# EAGLE board controller (EAGLE 8.1.1), part 1 of 2
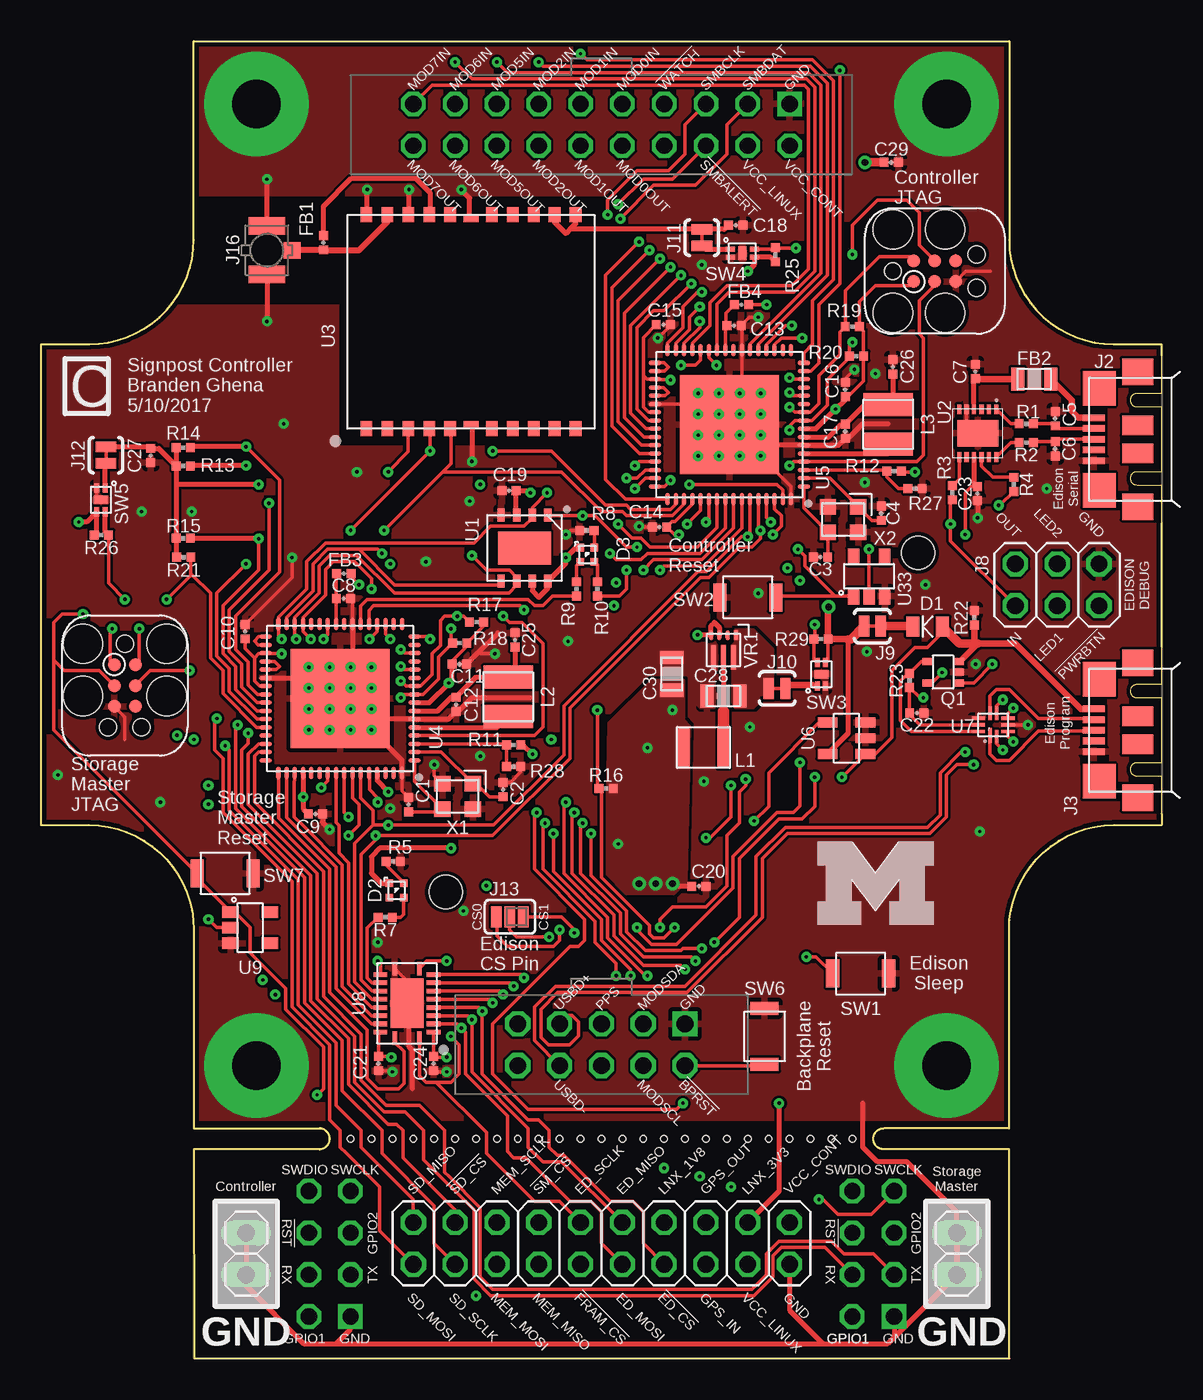
[diagram p0: board, top side]
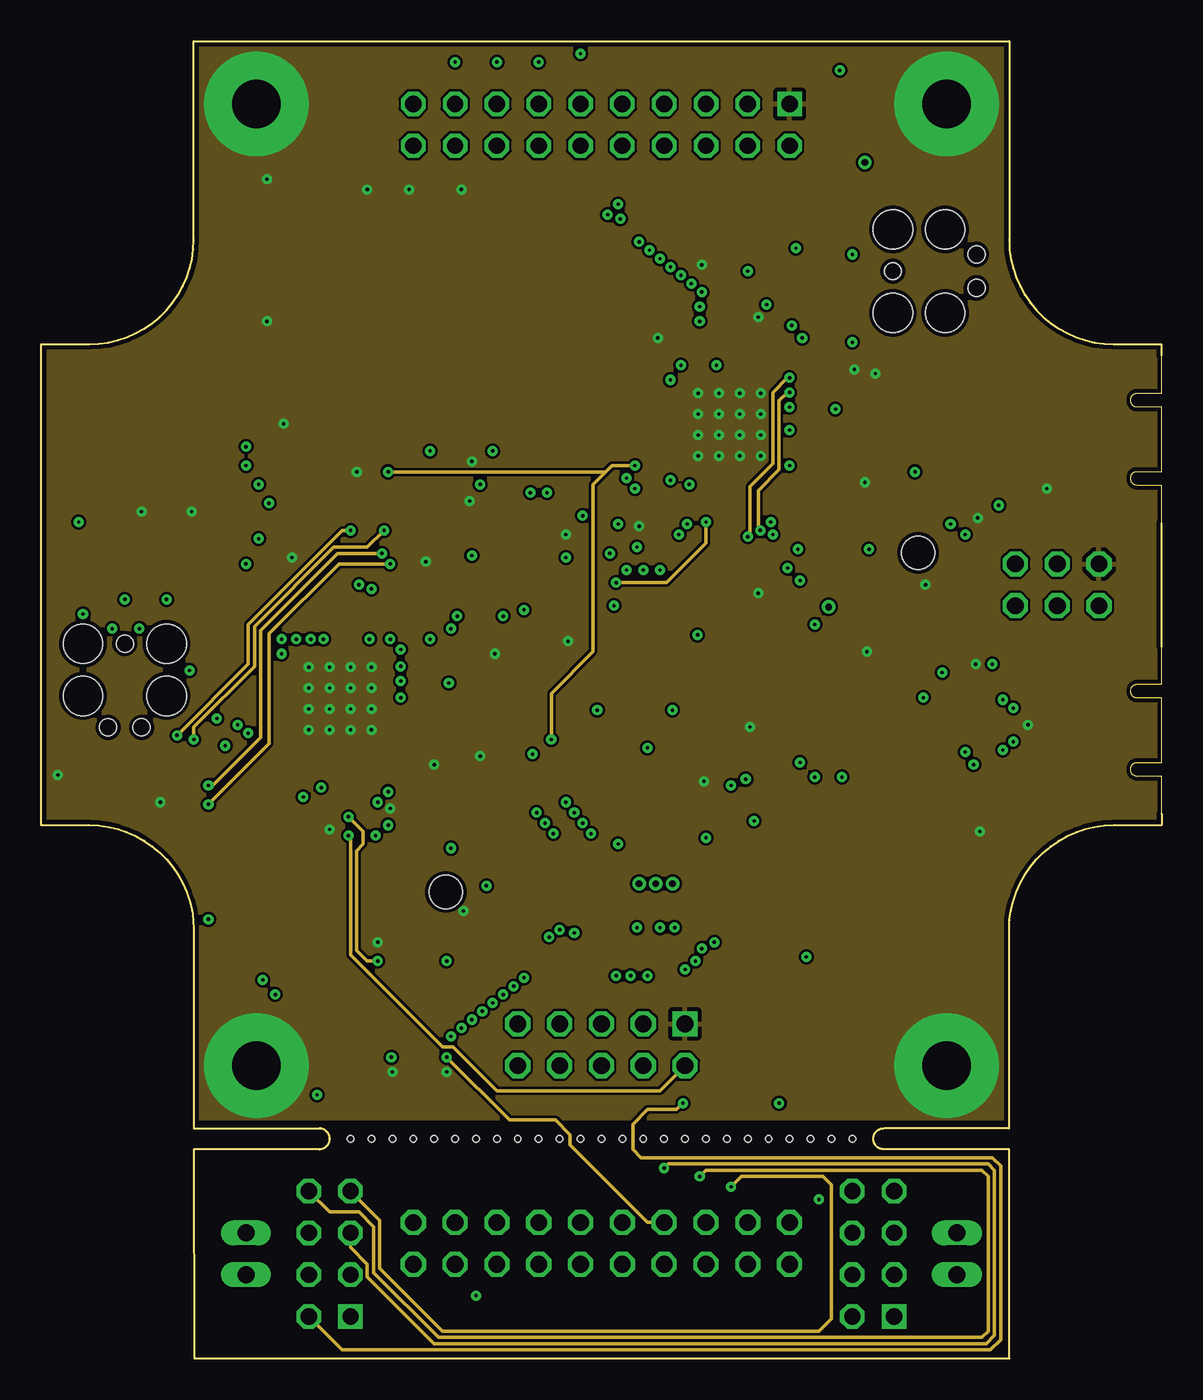
[diagram p1: board, inner layer Route2]
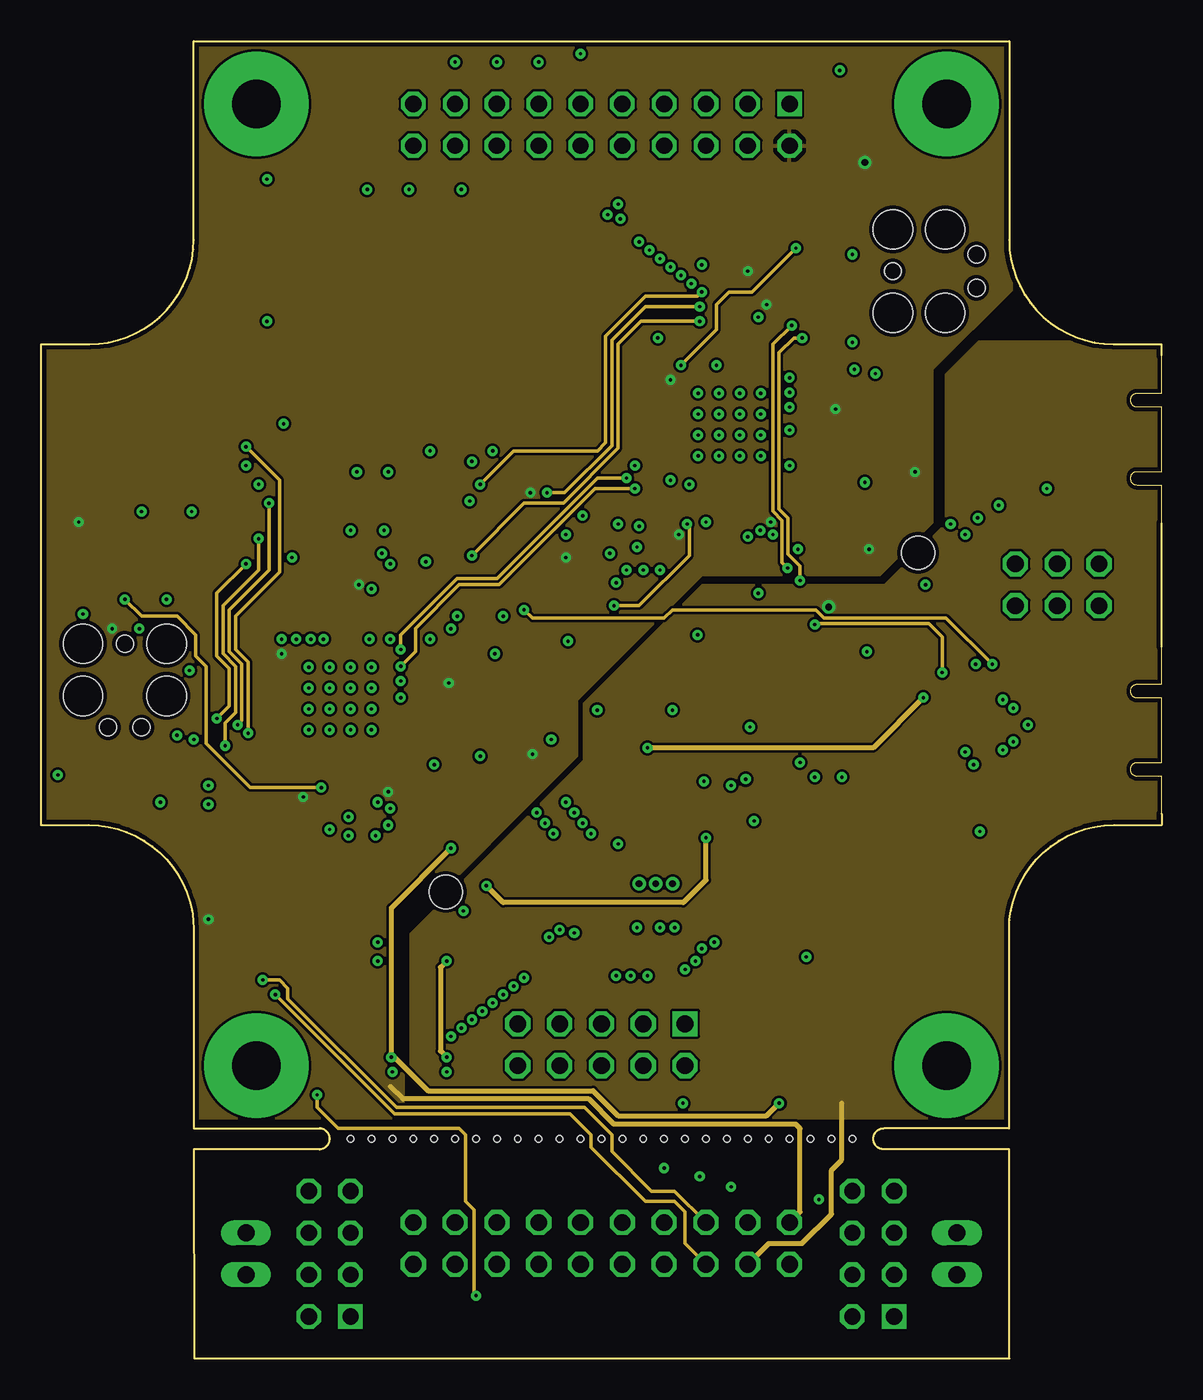
[diagram p2: board, inner layer Route15]
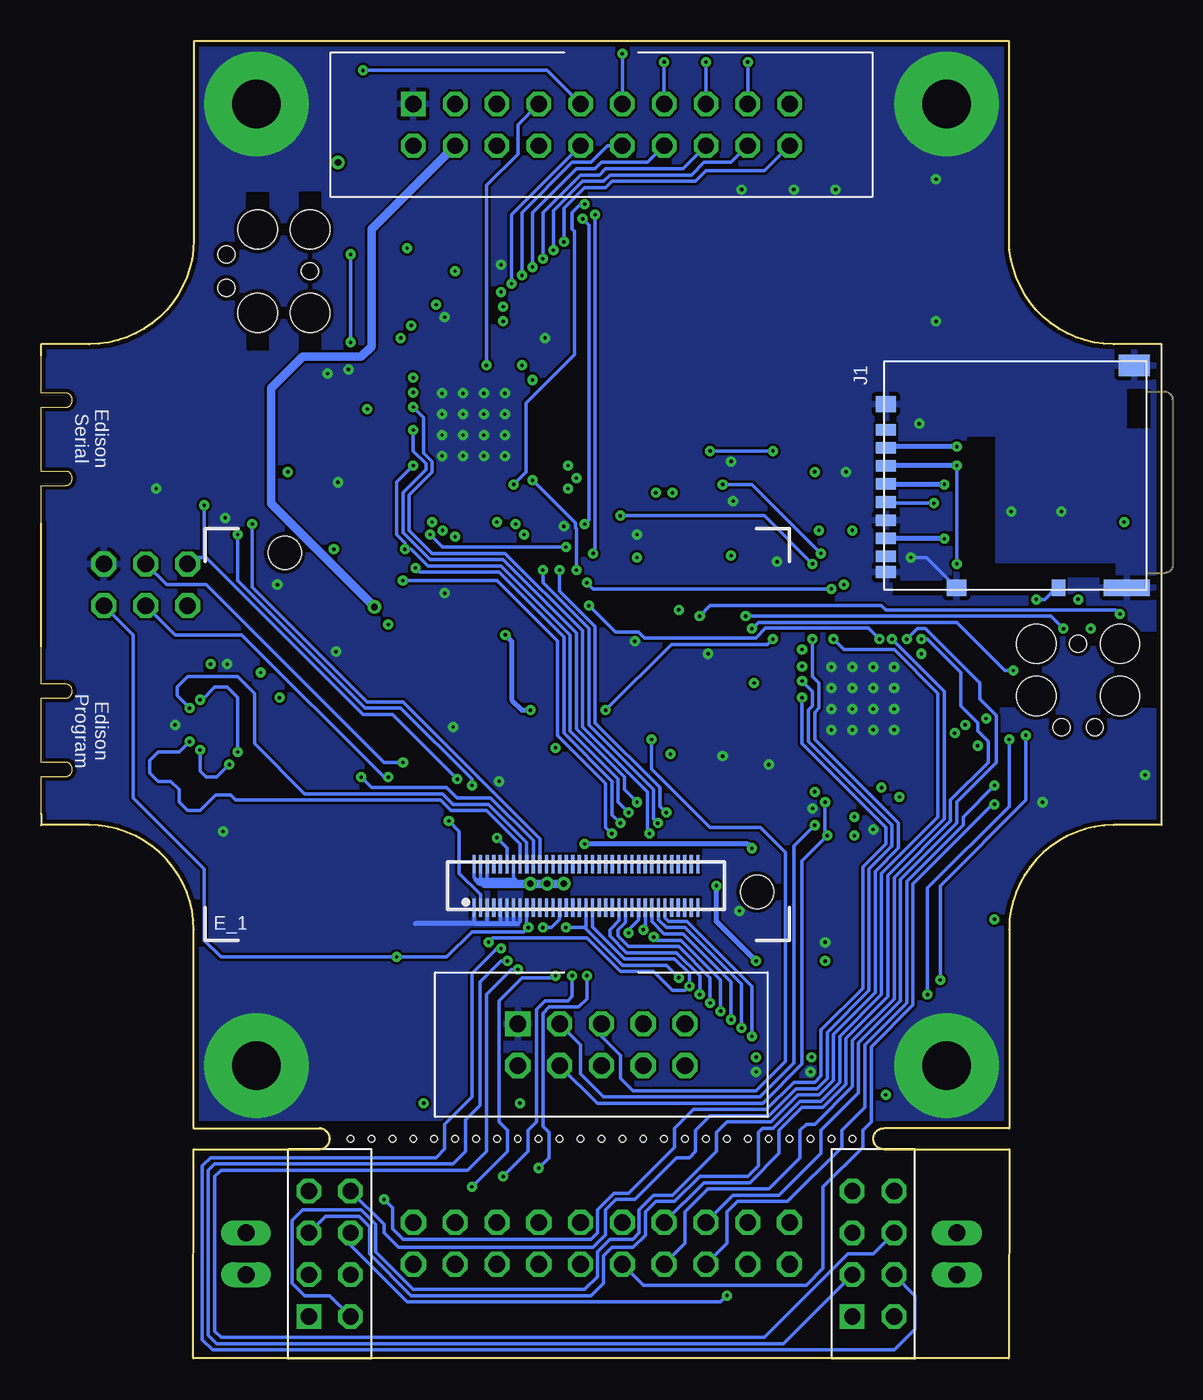
[diagram p3: board, bottom side, seen from below]

Size 68.07 x 80.01 mm. Coordinates in mm from the lower left corner, seen from the top.
Outline: 68.07,33.07 68.07,32.39 65.15,32.39 arc90 58.8,26.04 58.8,13.97 51.18,13.97 arc180 51.18,12.7 58.8,12.7 58.83,0 9.3,0 9.27,12.7 16.89,12.7 arc180 16.89,13.97 9.27,13.97 9.27,26.04 arc90 2.92,32.39 0,32.39 0,61.59 2.92,61.59 arc90 9.27,67.94 9.27,80.01 58.8,80.01 58.8,67.94 arc90 65.15,61.59 68.07,61.59 68.07,60.91
Outline: 68.07,43.23 68.07,50.72
Copper layers (1+2*15+16): Top 0.0178mm / dielectric 12mil / Route2 0.0356mm / dielectric 28mil / Route15 0.0356mm / dielectric 12mil / Bottom 0.0178mm
Design rules "sunstone-4lyr_v1.0.0.3 *": minimum track width 6mil, minimum drill 8mil, track to track 6mil, track to pad 6mil, pad to pad 6mil, via to via 6mil, smd to smd 6mil, copper to edge 10mil, drill to drill 16mil, minimum pad ring 8mil, minimum via ring 8mil, stop-mask expansion 3mil, vias tented up to drill 50mil, thermal gap 10mil

## Footprints (pad centres in the part's own frame; a part is rotated, then mirrored left to right if it is on the bottom)
0402_CAP = smd 0.536 x 0.546: 1 -0.433,0; 2 0.433,0
0805_CAP = smd 0.8 x 1.4: P$1 1,0; P$2 -1,0
0805_DIODE = smd 0.8 x 1.2: ANODE -0.9,0; CATHODE 0.9,0
1MM_SQ_4PAD = smd 0.457 x 0.457: 1 0.432,0.432; 2 0.432,-0.432; 3 -0.432,-0.432; 4 -0.432,0.432
EDISON_DAUGHTER = smd 1.14 x 0.2: 1 1.98,19.17; 2 4.62,19.17; 3 1.98,18.77; 4 4.62,18.77; 5 1.98,18.37; 6 4.62,18.37; 7 1.98,17.97; 8 4.62,17.97; 9 1.98,17.57; 10 4.62,17.57; 11 1.98,17.17; 12 4.62,17.17; 13 1.98,16.77; 14 4.62,16.77; 15 1.98,16.37; 16 4.62,16.37; 17 1.98,15.97; 18 4.62,15.97; 19 1.98,15.57; 20 4.62,15.57; 21 1.98,15.17; 22 4.62,15.17; 23 1.98,14.77; 24 4.62,14.77; 25 1.98,14.37; 26 4.62,14.37; 27 1.98,13.97; 28 4.62,13.97; 29 1.98,13.57; 30 4.62,13.57; 31 1.98,13.17; 32 4.62,13.17; 33 1.98,12.77; 34 4.62,12.77; 35 1.98,12.37; 36 4.62,12.37; 37 1.98,11.97; 38 4.62,11.97; 39 1.98,11.57; 40 4.62,11.57; 41 1.98,11.17; 42 4.62,11.17; 43 1.98,10.77; 44 4.62,10.77; 45 1.98,10.37; 46 4.62,10.37; 47 1.98,9.97; 48 4.62,9.97; 49 1.98,9.57; 50 4.62,9.57; 51 1.98,9.17; 52 4.62,9.17; 53 1.98,8.77; 54 4.62,8.77; 55 1.98,8.37; 56 4.62,8.37; 57 1.98,7.97; 58 4.62,7.97; 59 1.98,7.57; 60 4.62,7.57; 61 1.98,7.17; 62 4.62,7.17; 63 1.98,6.77; 64 4.62,6.77; 65 1.98,6.37; 66 4.62,6.37; 67 1.98,5.97; 68 4.62,5.97; 69 1.98,5.57; 70 4.62,5.57 | hole 2: 23.53,30.67; 2.93,1.98
DM3AT-SF-PEJM5 = smd 0.7 x 1.2: 1 3.2,-0.1; 2 2.1,-0.1; 3 1,-0.1; 4 -0.1,-0.1; 5 -1.2,-0.1; 6 -2.3,-0.1; 7 -3.4,-0.1; 8 -4.5,-0.1; B -5.45,-0.1 | smd 1 x 0.8: A -6.4,-10.6 | smd 1 x 1.2: MOUNT0 4.75,-0.1; MOUNT1 -6.4,-4.4 | smd 1 x 2.8: MOUNT2 -6.4,-14.75 | smd 1.3 x 1.9: MOUNT3 7.1,-15.2
USB_MICRO_B-HIROSE-ZX62R-B-5P = smd 0.4 x 1.35: 1 1.3,4.125; 2 0.65,4.125; 3 0,4.125; 4 -0.65,4.125; 5 -1.3,4.125 | smd 2.1 x 2: P$1 3.1,3.8; P$2 -3.1,3.8 | smd 1.6 x 1.9: P$3 -4.1,1.45; P$6 4.1,1.45 | smd 1.2 x 1.9: P$4 -0.85,1.45; P$5 0.85,1.45
MODULE_CONTROLLER = drill 0.991 square: 1 11.43,29.21; 100 -15.24,-44.45; 200 17.78,-44.45 | drill 0.991 octagon: 2 11.43,26.67; 3 8.89,29.21; 4 8.89,26.67; 5 6.35,29.21; 6 6.35,26.67; 7 3.81,29.21; 8 3.81,26.67; 9 1.27,29.21; 10 1.27,26.67; 11 -1.27,29.21; 12 -1.27,26.67; 13 -3.81,29.21; 14 -3.81,26.67; 15 -6.35,29.21; 16 -6.35,26.67; 17 -8.89,29.21; 18 -8.89,26.67; 19 -11.43,29.21; 20 -11.43,26.67; 101 -17.78,-44.45; 102 -15.24,-41.91; 103 -17.78,-41.91; 104 -15.24,-39.37; 105 -17.78,-39.37; 106 -15.24,-36.83; 107 -17.78,-36.83; 201 15.24,-44.45; 202 17.78,-41.91; 203 15.24,-41.91; 204 17.78,-39.37; 205 15.24,-39.37; 206 17.78,-36.83; 207 15.24,-36.83 | drill 1.016 square: 21 5.08,-26.67 | drill 1.016 octagon: 22 5.08,-29.21; 23 2.54,-26.67; 24 2.54,-29.21; 25 0,-26.67; 26 0,-29.21; 27 -2.54,-26.67; 28 -2.54,-29.21; 29 -5.08,-26.67; 30 -5.08,-29.21 | hole 0.381: 0,-33.655; 1.27,-33.655; -1.27,-33.655; 3.81,-33.655; 5.08,-33.655; 2.54,-33.655; -3.81,-33.655; -2.54,-33.655; -5.08,-33.655; 11.43,-33.655; 12.7,-33.655; 10.16,-33.655; 15.24,-33.655; 13.97,-33.655; 7.62,-33.655; 8.89,-33.655; 6.35,-33.655; -11.43,-33.655; -10.16,-33.655; -12.7,-33.655; -7.62,-33.655; -6.35,-33.655; -8.89,-33.655; -15.24,-33.655; -13.97,-33.655
1X02 = drill 1.016 long: 1 -1.27,0; 2 1.27,0
2X10 = drill 1.016 octagon: 1 -11.43,-1.27; 2 -11.43,1.27; 3 -8.89,-1.27; 4 -8.89,1.27; 5 -6.35,-1.27; 6 -6.35,1.27; 7 -3.81,-1.27; 8 -3.81,1.27; 9 -1.27,-1.27; 10 -1.27,1.27; 11 1.27,-1.27; 12 1.27,1.27; 13 3.81,-1.27; 14 3.81,1.27; 15 6.35,-1.27; 16 6.35,1.27; 17 8.89,-1.27; 18 8.89,1.27; 19 11.43,-1.27; 20 11.43,1.27
2X03 = drill 1.016 octagon: 1 -2.54,-1.27; 2 -2.54,1.27; 3 0,-1.27; 4 0,1.27; 5 2.54,-1.27; 6 2.54,1.27
SJ_2S-TRACE = smd 0.635 x 1.27: 1 -0.508,0; 2 0.508,0
SJ_3_PASTE2&3 = smd 0.635 x 1.27: 1 -0.813,0; 2 0,0; 3 0.813,0
TC2030-IDC = smd 0.787 x 0.787: 1 -1.27,-0.635; 2 -1.27,0.635; 3 0,-0.635; 4 0,0.635; 5 1.27,-0.635; 6 1.27,0.635 | hole 2.375: -2.54,2.54; 0.635,2.54; 0.635,-2.54; -2.54,-2.54 | hole 1.016: -2.54,0; 2.54,1.016; 2.54,-1.016
U.FL_SMT = smd 1.05 x 2.2: GND1 -1.475,0; GND2 1.475,0 | smd 1 x 1.05: SIG 0,-1.525
DFE322512C = smd 0.75 x 2.5: P$1 1.225,0; P$2 -1.225,0
1212 = smd 1.4 x 3: P$1 -1.2,0; P$2 1.2,0
SOT353 = smd 0.42 x 0.6: D1 0.65,-0.95; D2 -0.65,-0.95; G1 0.65,0.95; G2 -0.65,0.95; S 0,0.95
0402_RES = smd 0.536 x 0.546: 1 -0.433,0; 2 0.433,0
B3U-1000P = smd 0.8 x 1.7: 1 -1.7,0; 2 1.7,0
TDFN4 = smd 0.3 x 0.55: 1 -0.25,-0.725; 2 0.25,-0.725; 3 0.25,0.725; 4 -0.25,0.725 | smd 0.86 x 0.5: PAD 0,0
TDFN-8 = smd 0.45 x 0.8: 1 -1.425,-2.007; 2 -0.475,-2.007; 3 0.475,-2.007; 4 1.425,-2.007; 5 1.425,2.007; 6 0.475,2.007; 7 -0.475,2.007; 8 -1.425,2.007 | smd 3.2 x 2: NC 0,0
DFN-12/3MM = smd 0.6 x 0.25: 1 -1.45,1.13; 2 -1.45,0.68; 3 -1.45,0.23; 4 -1.45,-0.23; 5 -1.45,-0.68; 6 -1.45,-1.13; 7 1.45,-1.13; 8 1.45,-0.68; 9 1.45,-0.23; 10 1.45,0.23; 11 1.45,0.68; 12 1.45,1.13 | smd 1.6 x 2.5: 13 0,0
RXM-GPS-RM-T = smd 0.711 x 0.914: 1 -6.35,-6.502; 2 -5.08,-6.502; 3 -3.81,-6.502; 4 -2.54,-6.502; 5 -1.27,-6.502; 6 1.27,-6.502; 7 2.54,-6.502; 8 3.81,-6.502; 9 5.08,-6.502; 10 6.35,-6.502; 11 6.35,6.502; 12 5.08,6.502; 13 3.81,6.502; 14 2.54,6.502; 15 1.27,6.502; 16 -1.27,6.502; 17 -2.54,6.502; 18 -3.81,6.502; 19 -5.08,6.502; 20 -6.35,6.502 | smd 0.914 x 0.457: 21 0,-6.274; 22 0,6.274
QFN-64-9MM = smd 0.75 x 0.28: 1 -4.525,3.75; 2 -4.525,3.25; 3 -4.525,2.75; 4 -4.525,2.25; 5 -4.525,1.75; 6 -4.525,1.25; 7 -4.525,0.75; 8 -4.525,0.25; 9 -4.525,-0.25; 10 -4.525,-0.75; 11 -4.525,-1.25; 12 -4.525,-1.75; 13 -4.525,-2.25; 14 -4.525,-2.75; 15 -4.525,-3.25; 16 -4.525,-3.75; 33 4.525,-3.75; 34 4.525,-3.25; 35 4.525,-2.75; 36 4.525,-2.25; 37 4.525,-1.75; 38 4.525,-1.25; 39 4.525,-0.75; 40 4.525,-0.25; 41 4.525,0.25; 42 4.525,0.75; 43 4.525,1.25; 44 4.525,1.75; 45 4.525,2.25; 46 4.525,2.75; 47 4.525,3.25; 48 4.525,3.75 | smd 0.28 x 0.75: 17 -3.75,-4.525; 18 -3.25,-4.525; 19 -2.75,-4.525; 20 -2.25,-4.525; 21 -1.75,-4.525; 22 -1.25,-4.525; 23 -0.75,-4.525; 24 -0.25,-4.525; 25 0.25,-4.525; 26 0.75,-4.525; 27 1.25,-4.525; 28 1.75,-4.525; 29 2.25,-4.525; 30 2.75,-4.525; 31 3.25,-4.525; 32 3.75,-4.525; 49 3.75,4.525; 50 3.25,4.525; 51 2.75,4.525; 52 2.25,4.525; 53 1.75,4.525; 54 1.25,4.525; 55 0.75,4.525; 56 0.25,4.525; 57 -0.25,4.525; 58 -0.75,4.525; 59 -1.25,4.525; 60 -1.75,4.525; 61 -2.25,4.525; 62 -2.75,4.525; 63 -3.25,4.525; 64 -3.75,4.525 | smd 6 x 6: GND 0,0
SOT-23-5 = smd 0.6 x 1.2: 1 -0.95,-1.15; 2 0,-1.15; 3 0.95,-1.15; 4 0.95,1.15; 5 -0.95,1.15
UQFN-10 = smd 0.2 x 0.9: 1 -0.2,-0.65 | smd 0.2 x 0.8: 2 0.2,-0.7; 6 0.2,0.7; 7 -0.2,0.7 | smd 0.8 x 0.2: 3 0.9,-0.4; 4 0.9,0; 5 0.9,0.4; 8 -0.9,0.4; 9 -0.9,0; 10 -0.9,-0.4
R-PVQFN-N20 = smd 0.825 x 0.28: 1 -2.112,-0.75; 10 2.112,-0.75; 11 2.112,0.75; 20 -2.112,0.75 | smd 0.28 x 0.825: 2 -1.75,-1.613; 3 -1.25,-1.613; 4 -0.75,-1.613; 5 -0.25,-1.613; 6 0.25,-1.613; 7 0.75,-1.613; 8 1.25,-1.613; 9 1.75,-1.613; 12 1.75,1.613; 13 1.25,1.613; 14 0.75,1.613; 15 0.25,1.613; 16 -0.25,1.613; 17 -0.75,1.613; 18 -1.25,1.613; 19 -1.75,1.613 | smd 3 x 2: THERMAL 0,0
SOT23-5 = smd 0.7 x 1: 1 0.95,1.2; 2 0,1.2; 3 -0.95,1.2; 4 -0.95,-1.2; 5 0.95,-1.2
RLT0007A = smd 0.6 x 0.25: 1 -0.9,0.75; 2 -0.9,0.25; 3 -0.9,-0.25; 4 -0.9,-0.75 | smd 1.5 x 0.3: 5 0.45,-0.6; 6 0.45,0; 7 0.45,0.6
FHXXX = smd 1 x 0.95: 1 -0.925,-0.775; 2 0.925,-0.775; 3 0.925,0.775; 4 -0.925,0.775

## Placement (x,y rotation side)
C1  8pF  [0402_CAP]  22.33,33.63 90 top
C2  8pF  [0402_CAP]  28.07,34.54 90 top
C3  8pF  [0402_CAP]  47.35,48.67 180 top
C4  8pF  [0402_CAP]  51.03,51.33 90 top
C5  47pF  [0402_CAP]  61.59,57.07 90 top
C6  47pF  [0402_CAP]  61.59,55.25 270 top
C7  10nF  [0402_CAP]  56.75,59.94 90 top
C8  100nF  [0402_CAP]  18.36,46.15 0 top
C9  100nF  [0402_CAP]  16.66,33.07 0 top
C10  100nF  [0402_CAP]  12.4,44.15 90 top
C11  100nF  [0402_CAP]  25.4,42.16 0 top
C12  100nF  [0402_CAP]  25.2,39.73 270 top
C13  100nF  [0402_CAP]  42.09,62.74 0 top
C14  100nF  [0402_CAP]  37.57,50.5 180 top
C15  100nF  [0402_CAP]  37.8,62.79 0 top
C16  100nF  [0402_CAP]  48.84,58.85 90 top
C17  100nF  [0402_CAP]  48.84,56.31 270 top
C18  100nF  [0402_CAP]  42.19,68.83 0 top
C19  100nF  [0402_CAP]  28.42,52.7 180 top
C20  100nF  [0402_CAP]  39.95,28.68 0 top
C21  100nF  [0402_CAP]  20.49,17.91 90 top
C22  100nF  [0402_CAP]  53.19,39.19 0 top
C23  100nF  [0402_CAP]  56.87,52.53 270 top
C24  100nF  [0402_CAP]  23.84,17.91 90 top
C25  4.7uF  [0402_CAP]  28.78,43.64 90 top
C26  4.7uF  [0402_CAP]  51.74,60.22 90 top
C27  4.7uF  [0402_CAP]  6.65,54.84 270 top
C28  10uF  [0805_CAP]  41.45,40.23 0 top
C29  10uF  [0402_CAP]  51.64,72.64 0 top
C30  22uF  [0805_CAP]  38.3,41.58 270 top
D1  DIODE  [0805_DIODE]  53.85,44.45 180 top
D2  SML-LX0404SIUPGUSB  [1MM_SQ_4PAD]  21.59,28.42 90 top
D3  SML-LX0404SIUPGUSB  [1MM_SQ_4PAD]  33.17,48.82 90 top
E_1  EDISON_CONNECTOR_SEGMENTED  [EDISON_DAUGHTER]  22.61,25.4 90 bottom
FB1  300Ω  [0402_CAP]  17.15,67.77 270 top
FB2  600Ω  [0805_CAP]  60.33,59.49 180 top
FB3  1.5kΩ  [0402_CAP]  18.39,47.68 0 top
FB4  1.5kΩ  [0402_CAP]  42.55,64.01 0 top
J1  DM3AT-SF-PEJM5  [DM3AT-SF-PEJM5]  16.87,53.21 90 bottom
J2  MICRO_USB_B_HIROSE_ZX62R-B-5P  [USB_MICRO_B-HIROSE-ZX62R-B-5P]  68.07,55.83 90 top
J3  MICRO_USB_B_HIROSE_ZX62R-B-5P  [USB_MICRO_B-HIROSE-ZX62R-B-5P]  68.07,38.15 90 top
J4  MODULE_CONTROLLER  [MODULE_CONTROLLER]  34.04,46.99 0 top
J5  [1X02]  12.45,6.35 90 top
J6  [1X02]  55.63,6.35 90 top
J7  [2X10]  34.04,6.98 0 top
J8  [2X03]  61.72,46.99 180 top
J9  SOLDERJUMPERTRACE  [SJ_2S-TRACE]  50.5,44.48 0 top
J10  SOLDERJUMPERTRACE  [SJ_2S-TRACE]  44.7,40.69 180 top
J11  SOLDERJUMPERTRACE  [SJ_2S-TRACE]  40.13,68.07 90 top
J12  SOLDERJUMPERTRACE  [SJ_2S-TRACE]  3.94,54.86 90 top
J13  [SJ_3_PASTE2&3]  28.47,26.82 0 top
J14  TC2030-JLINK-L  [TC2030-IDC]  5.08,40.87 270 top
J15  TC2030-JLINK-L  [TC2030-IDC]  54.28,66.04 0 top
J16  U.FL-R-SMT  [U.FL_SMT]  13.72,67.31 90 top
L1  0.47uH  [DFE322512C]  40.23,37.11 0 top
L2  22uH  [1212]  28.37,40.18 270 top
L3  22uH  [1212]  51.46,56.74 270 top
LOGO1  UMICH_SOLID_MEDIUM  [UMICH_SOLID_200MIL]  47.14,26.31 0 top
Q1  DMN32D2LDF  [SOT353]  54.79,41.68 270 top
R1  27Ω  [0402_RES]  59.84,56.77 180 top
R2  27Ω  [0402_RES]  59.84,55.63 180 top
R3  100Ω  [0402_RES]  55.36,52.58 270 top
R4  100Ω  [0402_RES]  59.08,53.09 270 top
R5  1kΩ  [0402_RES]  21.39,30.18 0 top
R7  1kΩ  [0402_RES]  20.9,26.8 180 top
R8  1kΩ  [0402_RES]  33.15,50.29 180 top
R9  1kΩ  [0402_RES]  32.51,46.74 270 top
R10  1kΩ  [0402_RES]  33.78,46.74 270 top
R11  10kΩ  [0402_RES]  28.7,37.26 0 top
R12  10kΩ  [0402_RES]  51.82,53.9 0 top
R13  10kΩ  [0402_RES]  8.64,54.21 180 top
R14  10kΩ  [0402_RES]  8.64,55.31 180 top
R15  10kΩ  [0402_RES]  8.64,49.81 180 top
R16  10kΩ  [0402_RES]  34.32,34.62 0 top
R17  100kΩ  [0402_RES]  26.44,44.73 0 top
R18  100kΩ  [0402_RES]  25.43,43.46 0 top
R19  100kΩ  [0402_RES]  49.28,62.66 0 top
R20  100kΩ  [0402_RES]  49.53,60.88 0 top
R21  100kΩ  [0402_RES]  8.66,48.66 180 top
R22  100kΩ  [0402_RES]  56.69,44.98 90 top
R23  100kΩ  [0402_RES]  52.76,41.17 90 top
R25  1MΩ  [0402_RES]  44.6,67.03 270 top
R26  1MΩ  [0402_RES]  3.66,50.01 180 top
R27  DNP  [0402_RES]  53.09,52.83 180 top
R28  DNP  [0402_RES]  28.7,35.94 180 top
R29  1MΩ  [0402_RES]  47.37,43.69 0 top
SW1  B3U-1000P  [B3U-1000P]  49.78,23.37 0 top
SW2  B3U-1000P  [B3U-1000P]  42.93,46.23 180 top
SW3  SIP3240X  [TDFN4]  47.4,41.55 0 top
SW4  SIP3240X  [TDFN4]  42.6,67.13 270 top
SW5  SIP3240X  [TDFN4]  3.63,52.15 180 top
SW6  B3U-1000P  [B3U-1000P]  43.94,19.56 90 top
SW7  B3U-1000P  [B3U-1000P]  11.18,29.46 0 top
U1  FM25CLXXB-DG  [TDFN-8]  29.36,49.23 180 top
U2  FTDI234XD  [DFN-12/3MM]  56.9,56.2 270 top
U3  RXM-GPS-RM-T  [RXM-GPS-RM-T]  26.11,62.97 0 top
U4  SAM4LC8BA  [QFN-64-9MM]  18.16,40.08 180 top
U5  SAM4LC8BA  [QFN-64-9MM]  41.81,56.72 180 top
U6  SN74LVC1G125DBVR  [SOT-23-5]  48.92,37.67 90 top
U7  TS3USB30E  [UQFN-10]  57.84,38.48 0 top
U8  TXS0108EVQFN20  [R-PVQFN-N20]  22.23,21.56 90 top
U9  NCP301LSN30  [SOT23-5]  12.7,26.16 90 top
U33  NCP301LSN30  [SOT23-5]  50.29,47.5 180 top
VR1  TPS62086  [RLT0007A]  41.45,43.03 270 top
X1  16MHz  [FHXXX]  25.3,34.14 180 top
X2  16MHz  [FHXXX]  48.72,50.95 180 top

## Library data of the parts
C1-C4 = passives; DIGIKEY: 490-8230-1-ND
C5 C6 = passives; DIGIKEY: 490-6241-1-ND
C7 = passives; DIGIKEY: 490-6296-1-ND
C8-C24 = passives; DIGIKEY: 490-10777-1-ND
C25-C27 = passives; DIGIKEY: 490-13252-1-ND
C28 = passives; DIGIKEY: 490-8316-1-ND
C29 = passives; DIGIKEY: 490-13811-1-ND
C30 = passives; DIGIKEY: 490-1719-1-ND
D1 = passives; DIGIKEY: 478-7800-1-ND
D2 D3 = leds; DIGIKEY: 67-2125-1-ND
E_1 = Edison; AMAZON: B00PTVSS4A; MOUSER: 798-DF40HC3070DS4V51
FB1 = passives; DIGIKEY: ACML-0402-301-TCT-ND
FB2 = passives; DIGIKEY: 240-2390-1-ND
FB3 FB4 = passives; DIGIKEY: 1276-6395-1-ND
J1 = connector; DIGIKEY: HR1964CT-ND
J2 J3 = connector; DIGIKEY: H125274CT-ND
J4 = signpost; DIGIKEY: S9172-ND , S9169-ND , S2221EC-04-ND , S2221EC-04-ND
J5-J8 = pinhead
J9-J13 = SparkFun-Passives
J14 J15 = connector
J16 = connector; DIGIKEY: H122041-ND
L1 = passives; DIGIKEY: 490-10596-1-ND; MOUSER: 81-1277AS-H-R47MP2
L2 L3 = signpost; DIGIKEY: 490-5350-1-ND
LOGO1 = logos
Q1 = fets; DIGIKEY: DMN32D2LDF-7DICT-ND
R1 R2 = passives; DIGIKEY: 1276-3907-1-ND
R3 R4 = passives; DIGIKEY: 1276-3429-1-ND
R5 R7-R10 = passives; DIGIKEY: 1276-3430-1-ND
R11-R16 R27 R28 = passives; DIGIKEY: 1276-3431-1-ND
R17-R23 = passives; DIGIKEY: 1276-3432-1-ND
R25 R26 R29 = passives; DIGIKEY: 1276-3433-1-ND
SW1 SW2 SW6 SW7 = switches; DIGIKEY: SW1020CT-ND
SW3-SW5 = signpost; DIGIKEY: SIP32402ADNP-T1GE4CT-ND
U1 = chips; DIGIKEY: FM25CL64B-DGRA-ND
U2 = chips; DIGIKEY: 768-1178-1-ND; MOUSER: 895-FT234XD-R; NEWARK: 53X3171
U3 = chips; DIGIKEY: RXM-GPS-RM-TCT-ND
U4 U5 = chips; DIGIKEY: ATSAM4LC8BA-MURCT-ND
U6 = chips; DIGIKEY: 296-11603-1-nd
U7 = signpost; DIGIKEY: 296-24684-1-ND
U8 = chips; DIGIKEY: 296-24806-1-ND
U9 U33 = signpost; DIGIKEY: NCP301LSN30T1GOSCT-ND
VR1 = regulators; DIGIKEY: 296-40831-1-ND
X1 X2 = crystals; DIGIKEY: FH1600015CT-ND

## Nets
!BACKPLANE_RESET: J4.22 SW6.1 U4.58
!CONTROLLER_LED: R10.2 U5.48
!CONTROLLER_RESET: J4.105 J15.3 SW2.1 U5.4 U33.1
!EDISON_PWRBTN: E_1.17 J8.2 R16.1 SW1.1 U4.16
!EDISON_SPI_CS: U4.56 U8.16
!EDISON_SPI_CS_1V8: J7.13 J13.2 U8.5
!ENABLE_LINUX: Q1.G1 U4.21
!FRAM_CS: J7.9 U1.1 U5.62
!SD_CS: J1.2 J7.4 R14.1 U4.40
!SD_DETECT: J1.A R21.1 U4.44
!SMBALERT: J4.6 U5.63
!STORAGE_CS: J7.8 U4.29 U5.54
!STORAGE_LED: R9.2 U4.22
!STORAGE_RESET: J4.205 J14.3 SW7.1 U4.4 U9.1
!WATCHDOG: J4.7 U5.27
CONTROLLER_BUCK/LDO_N: R12.1 R27.2 U5.3
CONTROLLER_DEBUG_GPIO1: J4.101 U5.57
CONTROLLER_DEBUG_GPIO2: J4.104 U5.58
CONTROLLER_DEBUG_RX: J4.103 U5.19
CONTROLLER_DEBUG_TX: J4.102 U5.20
CONTROLLER_SWDCLK: J4.106 J15.4 R20.1 U5.9
CONTROLLER_SWDIO: J4.107 J15.2 R19.1 U5.10
CONTROLLER_XIN: C3.1 U5.1 X2.3
CONTROLLER_XOUT: C4.1 U5.2 X2.1
D+: C6.1 J2.3 R2.1
D-: C5.1 J2.2 R1.1
EDISON_INTERRUPT: U4.57 U8.12
EDISON_INTERRUPT_1V8: E_1.35 J8.3 U8.9
EDISON_LED1: E_1.37 J8.4 U8.8
EDISON_SPI_MISO: U4.51 U8.17
EDISON_SPI_MISO_1V8: E_1.55 J7.12 U8.4
EDISON_SPI_MOSI: U4.50 U8.18
EDISON_SPI_MOSI_1V8: E_1.57 J7.11 U8.3
EDISON_SPI_SCLK: U4.49 U8.20
EDISON_SPI_SCLK_1V8: E_1.59 J7.10 U8.1
EDISON_UART_RX: E_1.22 J8.6 R3.2
EDISON_UART_TX: E_1.27 J8.5 R4.2
GND: C1.2 C2.2 C3.2 C4.2 C5.2 C6.2 C7.2 C8.2 C9.2 C10.2 C11.2 C12.2 C13.2 C14.2 C15.2 C16.2 C17.2 C18.2 C19.2 C20.2 C21.1 C22.2 C23.2 C24.1 C25.2 C26.2 C27.2 C28.P$2 C29.2 C30.P$2 E_1.1 E_1.5 E_1.9 E_1.11 E_1.13 E_1.15 J1.6 J1.B J1.MOUNT0 J1.MOUNT1 J1.MOUNT2 J1.MOUNT3 J2.5 J3.5 J4.1 J4.21 J4.100 J4.200 J5.1 J5.2 J6.1 J6.2 J7.19 J8.1 J14.5 J15.5 J16.GND1 J16.GND2 Q1.S R5.2 R8.2 R22.2 R27.1 R28.1 SW1.2 SW2.2 SW3.2 SW3.PAD SW4.2 SW4.PAD SW5.2 SW5.PAD SW6.2 SW7.2 U1.4 U2.5 U2.13 U3.18 U3.20 U3.21 U3.22 U4.6 U4.23 U4.38 U4.64 U4.GND U5.6 U5.23 U5.38 U5.64 U5.GND U6.2 U6.3 U7.4 U7.8 U8.11 U8.THERMAL U9.3 U33.3 VR1.5 X1.2 X1.4 X2.2 X2.4
GPS_ENABLE_POWER: R25.1 SW4.4 U5.28
GPS_IN_RX: J7.15 U3.5 U5.51
GPS_OUT_TX: J7.16 U3.4 U5.50
LINUX_5V_IN: C28.P$1 J10.2 VR1.1 VR1.7
LINUX_ENABLE_POWER: Q1.D1 R29.1 SW3.4
MEMORY_MISO: J7.7 U1.2 U4.32 U5.31
MEMORY_MOSI: J7.5 U1.5 U4.31 U5.32
MEMORY_SCLK: J7.6 U1.6 U4.30 U5.30
MOD0_IN: J4.9 U5.15
MOD0_OUT: J4.10 U5.40
MOD1_IN: J4.11 U5.16
MOD1_OUT: J4.12 U5.41
MOD2_IN: J4.13 U5.21
MOD2_OUT: J4.14 U5.42
MOD5_IN: J4.15 U5.22
MOD5_OUT: J4.16 U5.43
MOD6_IN: J4.17 U5.26
MOD6_OUT: J4.18 U5.44
MOD7_IN: J4.19 U5.29
MOD7_OUT: J4.20 U5.49
MODSTORAGE_IN: U4.14 U5.46
MODSTORAGE_OUT: U4.12 U5.47
MODULES_SCL: J4.24 U4.60 U5.12 U5.60 U8.14
MODULES_SCL_1V8: E_1.45 U8.7
MODULES_SDA: J4.23 U4.59 U5.14 U5.59 U8.15
MODULES_SDA_1V8: E_1.47 U8.6
N$1: FB1.1 U3.17
N$2: R1.2 U2.1
N$3: FB1.2 J16.SIG U3.19
N$4: R2.2 U2.12
N$5: J3.2 U7.7
N$6: J3.3 U7.1
N$7: D3.2 R8.1
N$8: D3.4 R9.1
N$9: D3.3 R10.1
N$10: FB2.P$2 J2.1
N$11: E_1.53 J13.1
N$13: E_1.51 J13.3
N$14: L1.P$1 VR1.6
N$15: D1.CATHODE J9.2
N$16: J10.1 SW3.1
N$17: E_1.3 U6.4
N$18: J12.1 SW5.1
N$19: J11.1 SW4.1
N$24: R3.1 U2.7
N$25: R4.1 U2.10
N$28: C7.1 FB2.P$1 U2.4
N$29: C8.1 FB3.1 U4.25
N$30: Q1.D2 R23.2 U7.10
N$32: C13.1 FB4.1 U5.25
N$34: D2.2 R5.1
N$38: D2.3 R7.1
N$44: C17.1 C26.1 L3.P$1 U5.7
N$45: C12.1 C25.1 L2.P$1 U4.7
N$46: L2.P$2 U4.5
N$48: U4.33 U4.34
N$50: R7.2 U8.13
N$51: U4.36 U4.37
N$53: U5.36 U5.37
N$54: U5.33 U5.34
N$56: C18.1 J11.2 U3.11 U3.12
N$58: C27.1 J1.4 J12.2 R13.2 R14.2 R15.2 R21.2
N$59: L3.P$2 U5.5
PPS: J4.25 U3.3 U5.45
SD_ENABLE_POWER: R26.1 SW5.4 U4.55
SD_MISO: J1.7 J7.2 R15.1 U4.42
SD_MOSI: J1.3 J7.1 R13.1 U4.43
SD_SCLK: J1.5 J7.3 U4.41
SMBCLK: J4.5 U5.56
SMBDATA: J4.3 U5.55
STORAGE_BUCK/LDO_N: R11.1 R28.2 U4.3
STORAGE_DEBUG_GPIO1: J4.201 U4.19
STORAGE_DEBUG_GPIO2: J4.204 U4.20
STORAGE_DEBUG_RX: J4.203 U4.46
STORAGE_DEBUG_TX: J4.202 U4.47
STORAGE_INTERRUPT: U4.26 U5.53
STORAGE_SWDCLK: J4.206 J14.4 R18.1 U4.9
STORAGE_SWDIO: J4.207 J14.2 R17.1 U4.10
STORAGE_XIN: C1.1 U4.1 X1.3
STORAGE_XOUT: C2.1 U4.2 X1.1
USB_D+: E_1.16 U7.3
USB_D-: E_1.18 U7.5
USB_MOD_D+: J4.27 U7.2
USB_MOD_D-: J4.28 U7.6
USB_VBUS: D1.ANODE E_1.20 J3.1 Q1.G2 R22.1 U6.1
VCC_CONTROLLER: C9.1 C10.1 C11.1 C14.1 C15.1 C16.1 C19.1 C29.1 D3.1 FB3.2 FB4.2 J4.2 J7.20 J14.1 J15.1 R11.2 R12.2 R17.2 R18.2 R19.2 R20.2 R25.2 R26.2 SW4.3 SW5.3 U1.3 U1.7 U1.8 U4.8 U4.35 U4.39 U4.52 U4.61 U5.8 U5.35 U5.39 U5.52 U5.61 U9.2 U33.2
VCC_LINUX: J4.4 J7.17 J9.1 R29.2 SW3.3 U6.5
VCC_LINUX_1V8: C23.1 C24.2 E_1.12 J7.14 U2.9 U8.2 U8.10
VCC_LINUX_3V3: C20.1 C21.2 C22.1 C30.P$1 D2.1 E_1.2 E_1.4 E_1.6 E_1.14 J7.18 L1.P$2 R16.2 R23.1 U7.9 U8.19 VR1.3 VR1.4